# Altium PCB bme_radar.PcbDoc
Units mm, origin at the board's own origin, x right, y up, seen from the top; angles counter-clockwise.
Board outline 41 x 23 mm, 4 copper layers (Top Layer, GND, PWR, Bottom Layer), stack 0.603 mm thick; 42 components, 18 nets, 127 pads, 47 vias.
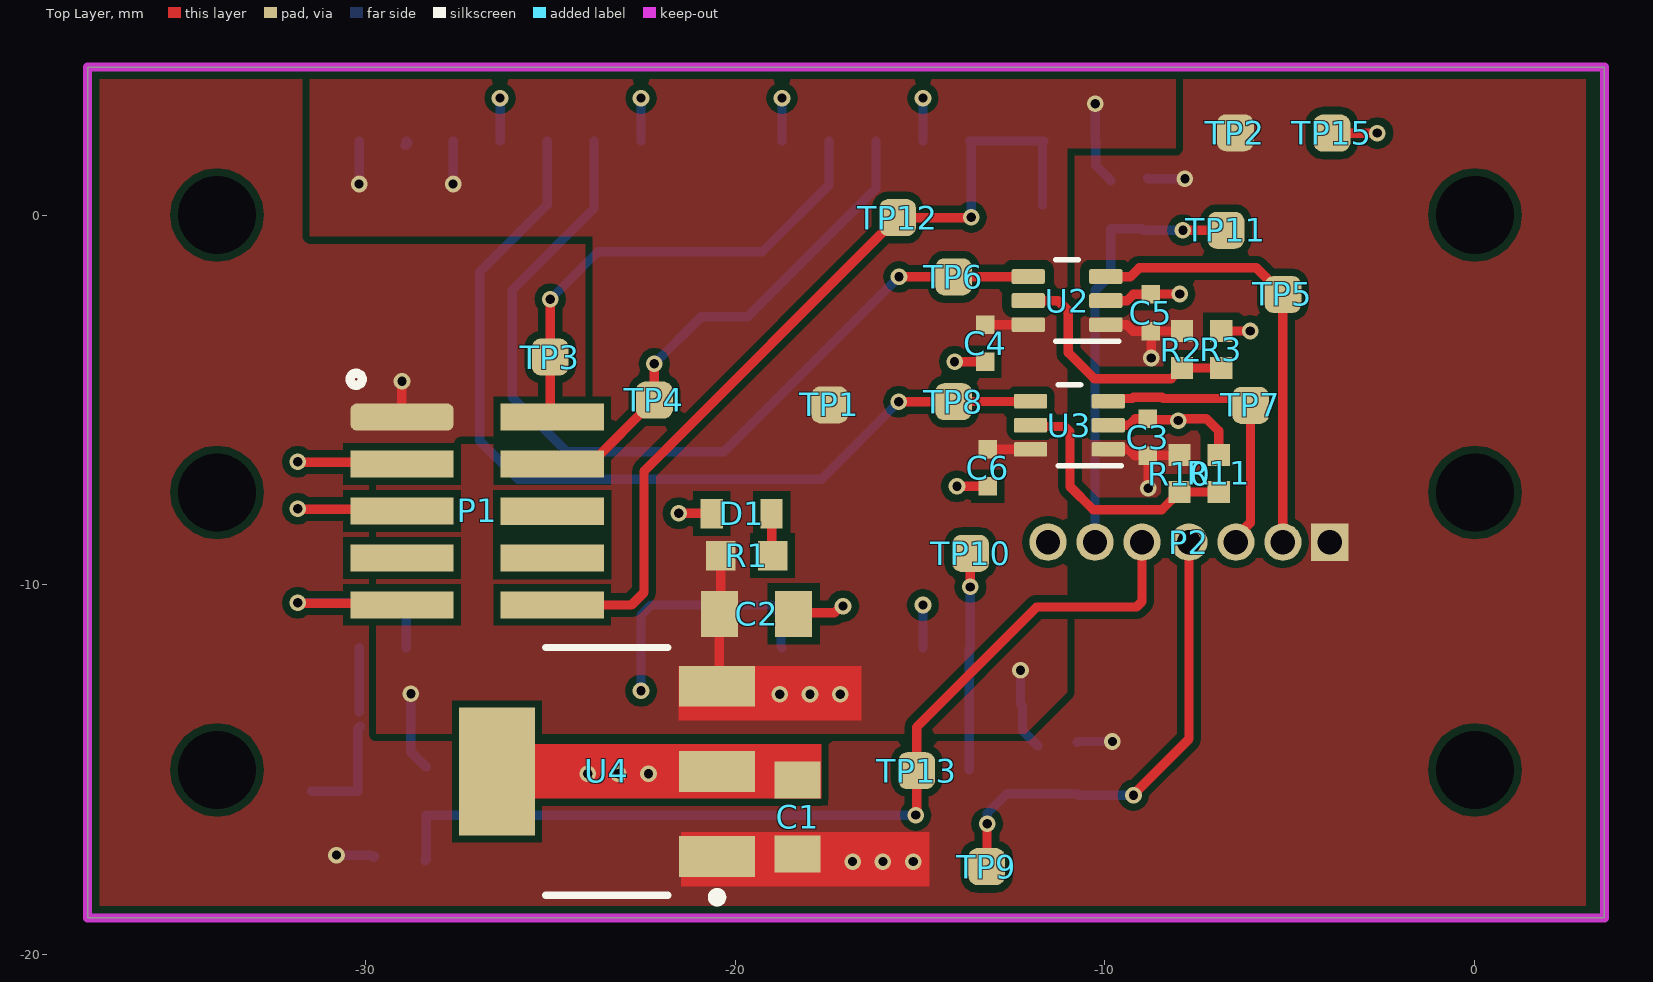
[diagram p0: Top Layer view]
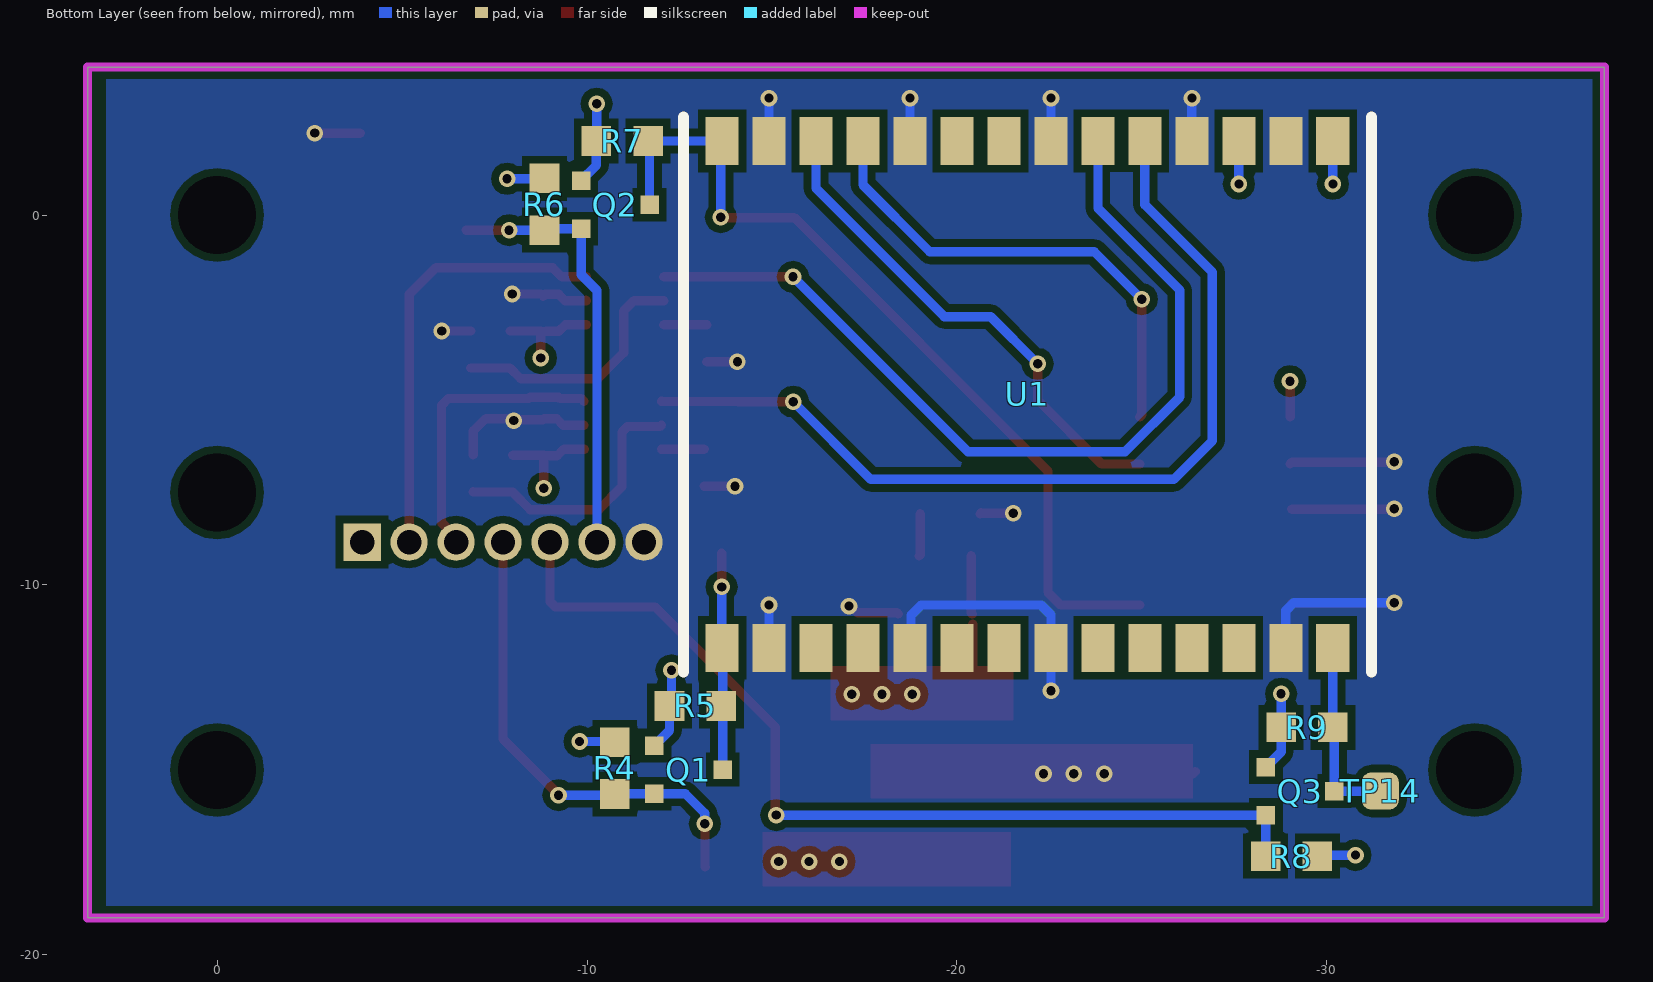
[diagram p1: Bottom Layer view, seen from below]
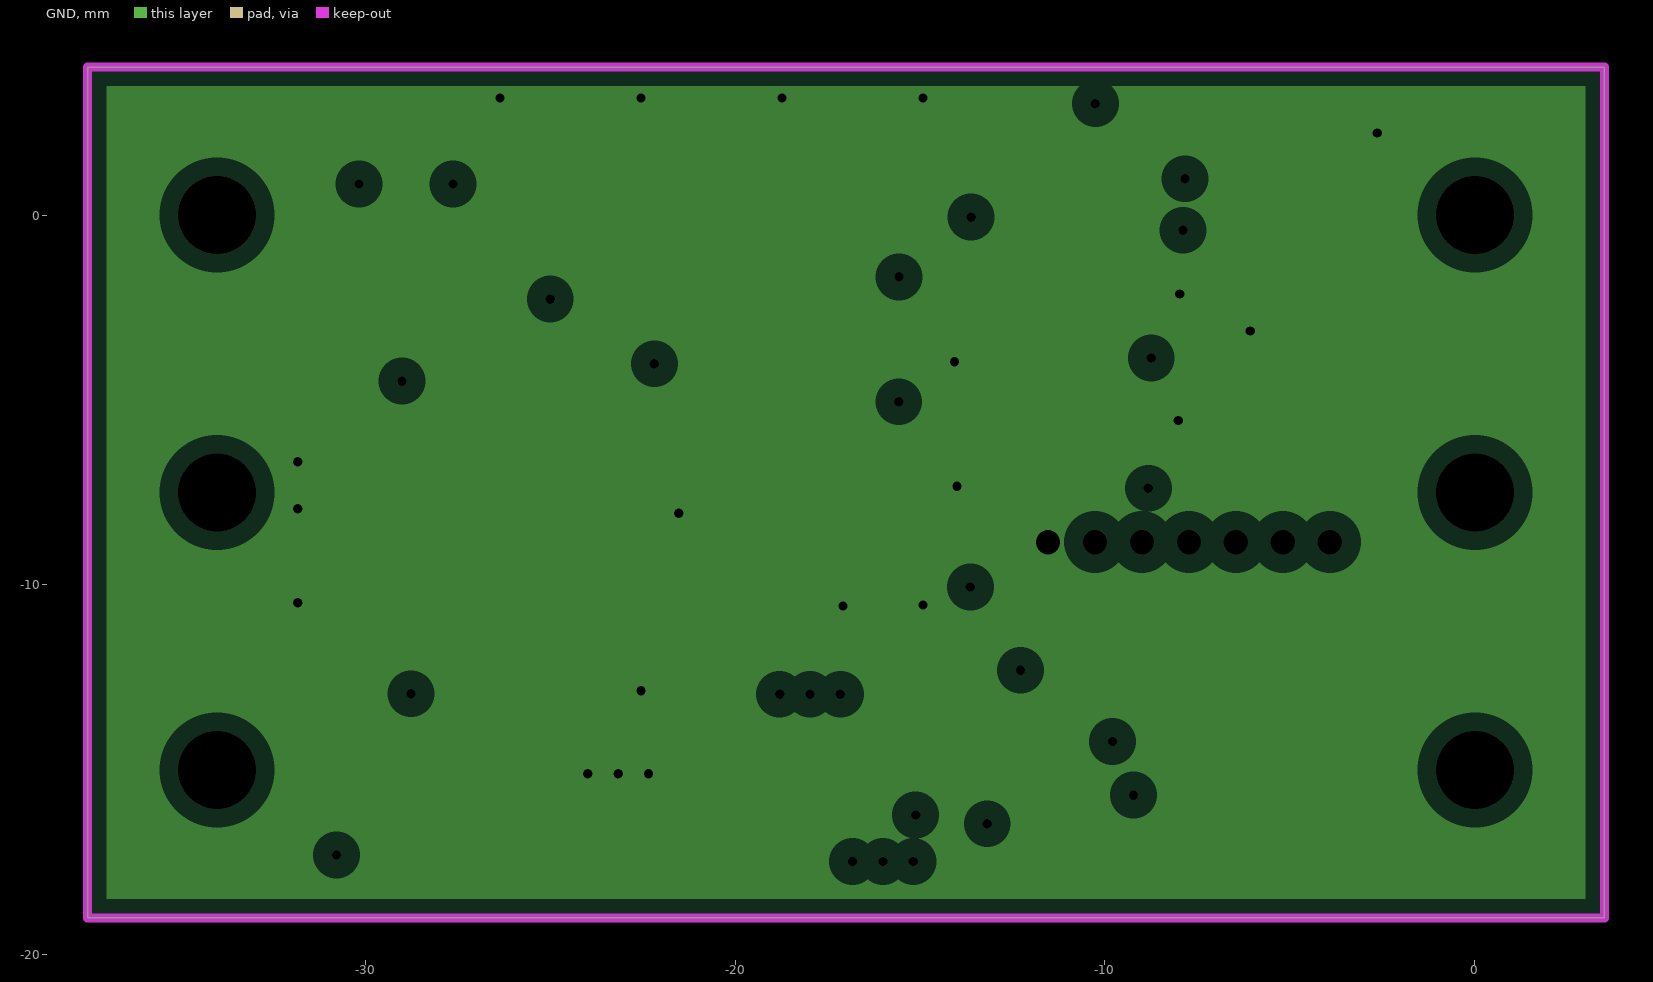
[diagram p2: GND, clearances drawn from the general rule]
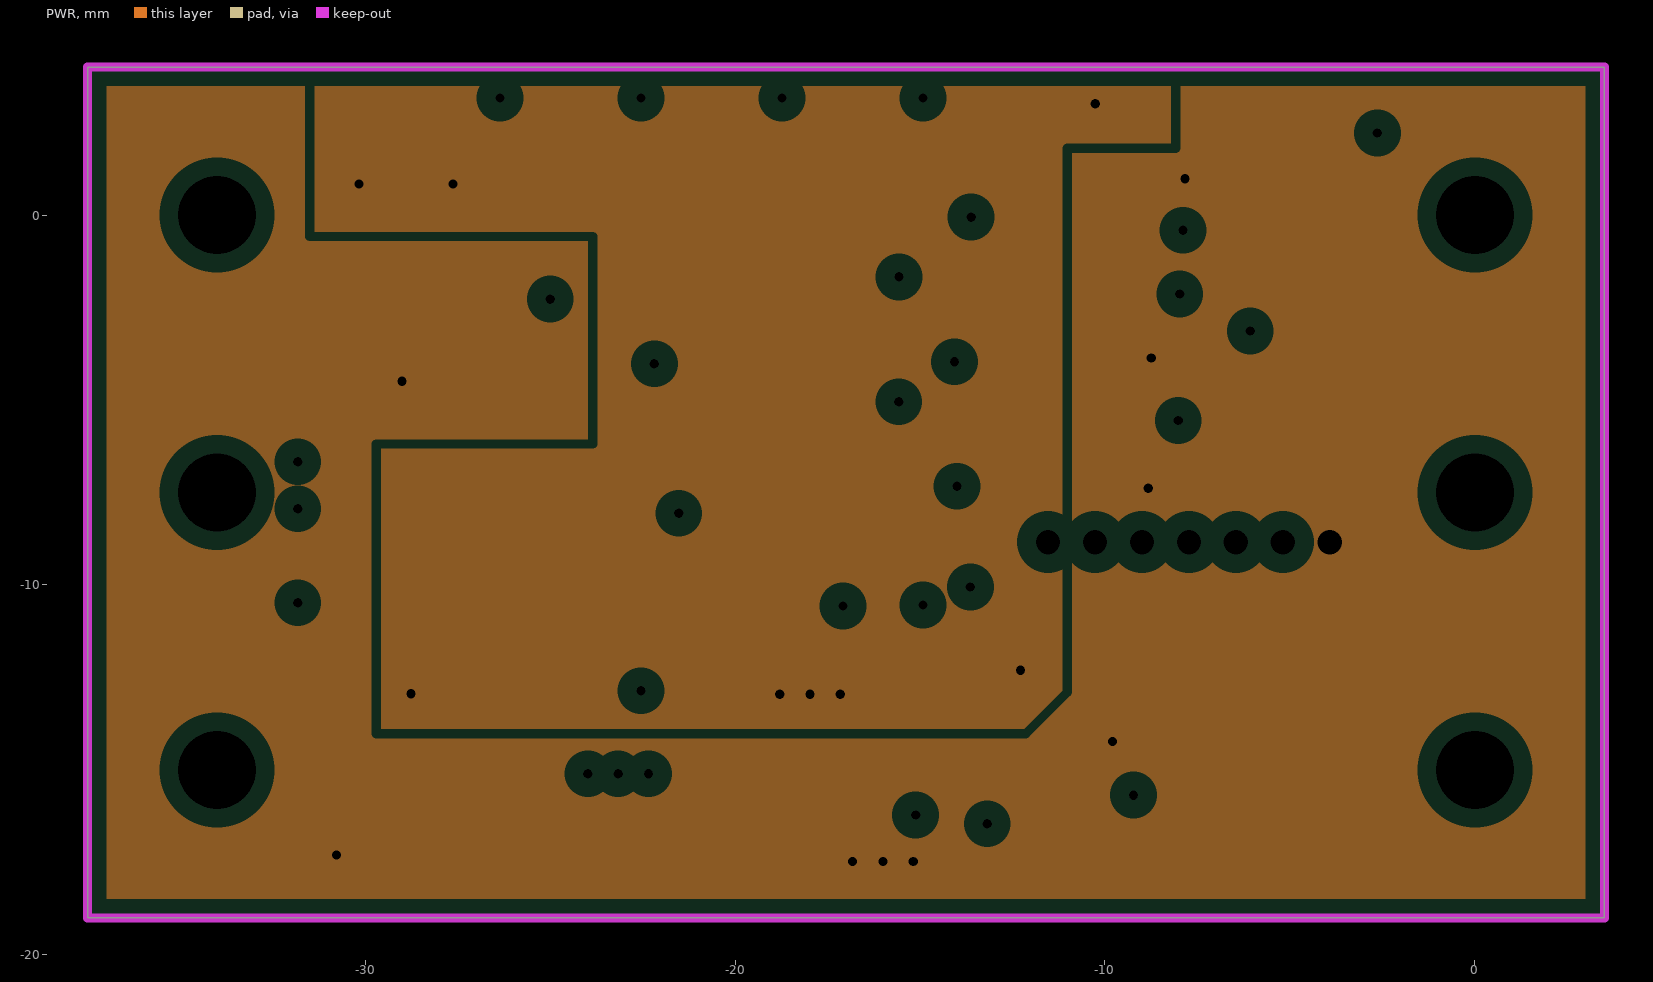
[diagram p3: PWR, clearances drawn from the general rule]
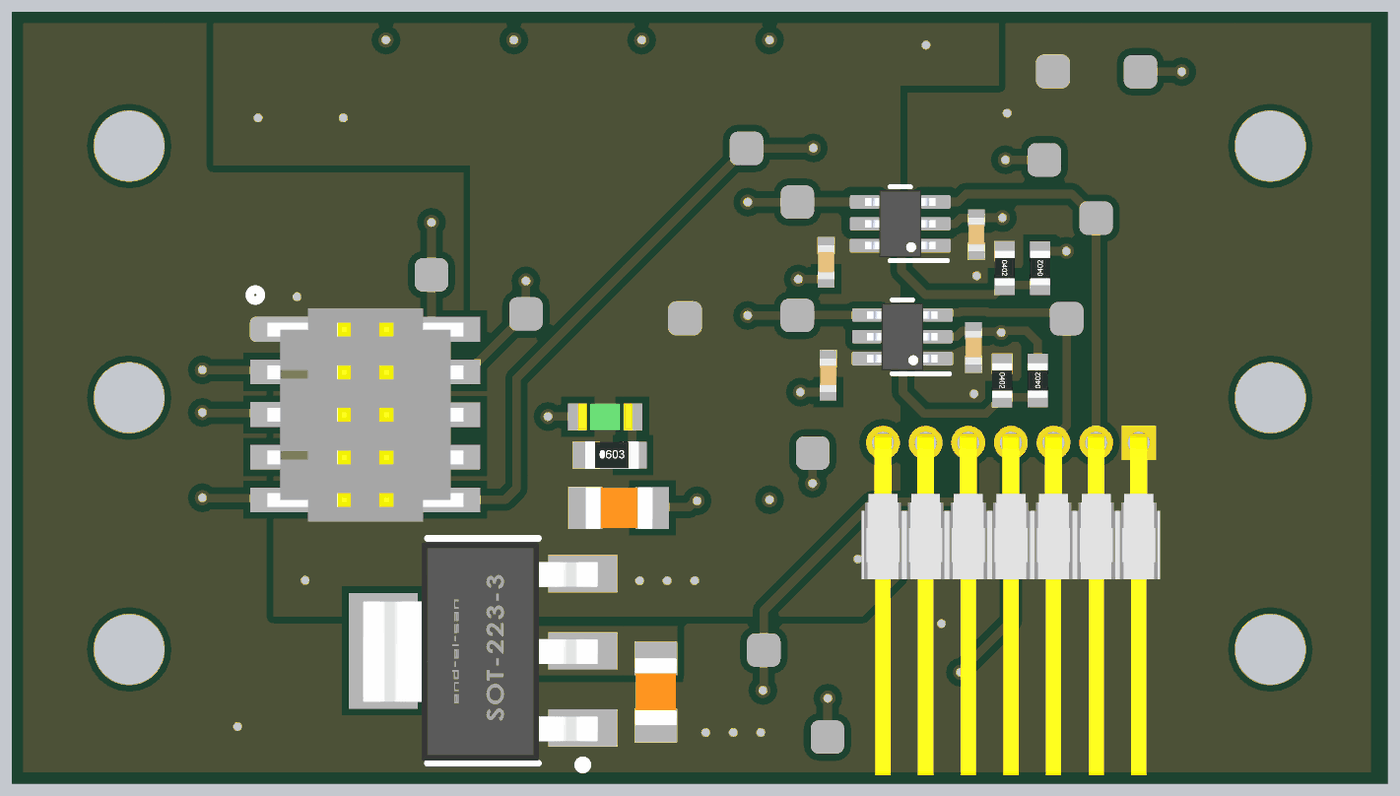
[diagram p4: 3D render of the assembled board from above, using the file's embedded part models]
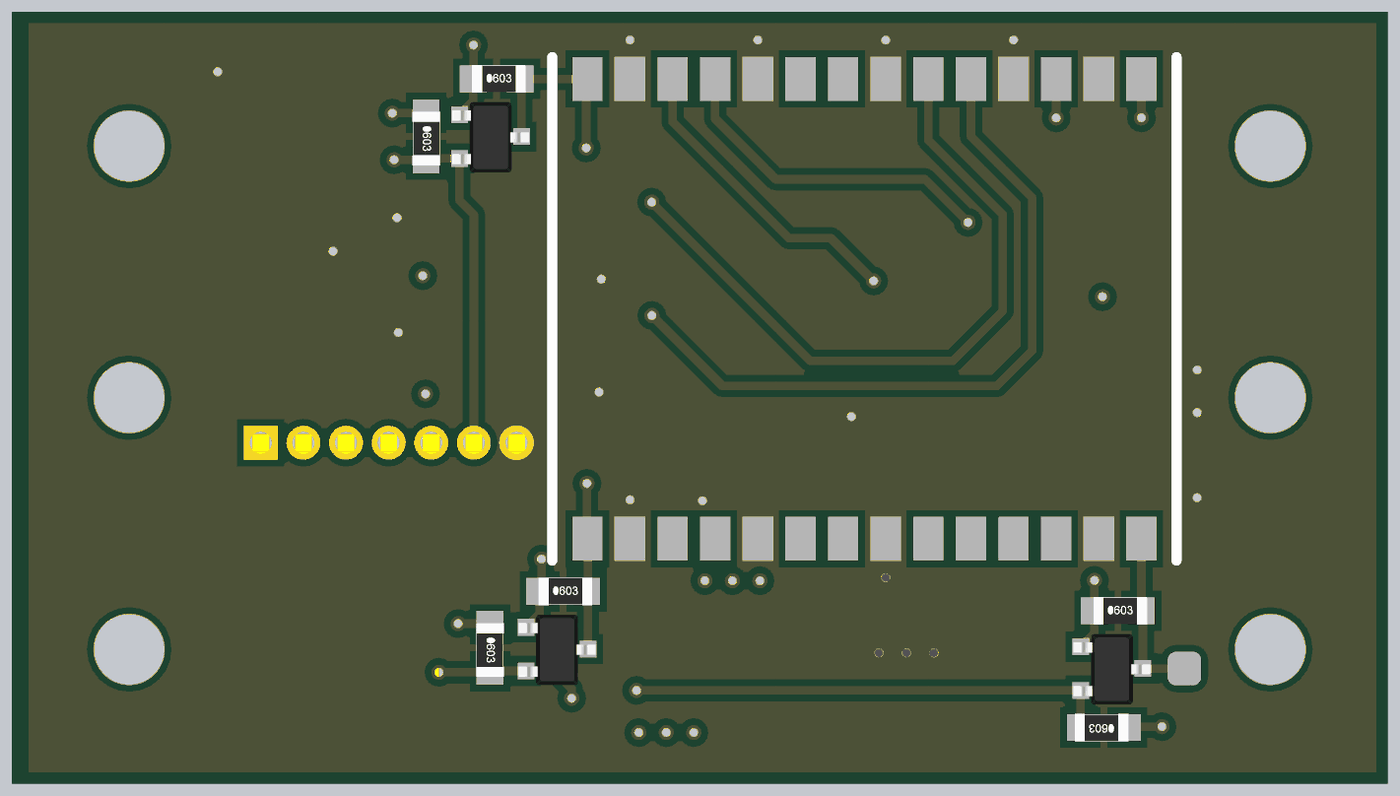
[diagram p5: 3D render of the assembled board from below, using the file's embedded part models]

## Layer stack, top to bottom
Top Solder: solder mask 0.0102, Solder Resist, Dk 3.5
Top Layer: signal copper 0.0356
Dielectric 2: prepreg 0.0711, PP-006, Dk 4.1
GND: plane copper 0.035, net GND
Dielectric 1: dielectric 0.32, FR-4, Dk 4.8
PWR: plane copper 0.035, net (Multiple Nets)
Dielectric 3: prepreg 0.0711, PP-006, Dk 4.1
Bottom Layer: signal copper 0.0356
Bottom Solder: solder mask 0.0102, Solder Resist, Dk 3.5

## Board outline
-37.5,-19 3.5,-19 3.5,4 -37.5,4

## Design rules (kind name [scope] priority, off if disabled: settings)
Clearance Clearance_1 [InComponent('U2')] p1: gap=0.254 ignorepadtopadclearanceinfootprint=FALSE except(0: Arc-Hole Track-Hole SMDPad-Hole THPad-Hole Via-Hole Fill-Hole Poly-Hole Region-Hole Text-Hole; 0.2: Arc-Arc Arc-Track Arc-SMDPad Track-Track Track-SMDPad SMDPad-SMDPad)
Clearance [All] p2: gap=0.2 ignorepadtopadclearanceinfootprint=FALSE except(0: Arc-Hole Track-Hole SMDPad-Hole THPad-Hole Via-Hole Fill-Hole Poly-Hole Region-Hole Text-Hole)
MinimumSolderMaskSliver [All] p1: minsoldermaskwidth=0.15
PlaneClearance [All] p1: clearance=0.508
PlaneConnect [All] p1: planeconnectstyle=Direct reliefexpansion=0.508 reliefentries=4 reliefconductorwidth=0.254 reliefairgap=0.254
PolygonConnect [All] p1: connectstyle=Direct reliefconductorwidth=0.254 reliefentries=4 polygonreliefangle="90 Angle" airgapwidth=0.254
RoutingVias [All] p1: holewidth=0.25 width=0.45 viastyle="Through Hole" minholewidth=0.25 minwidth=0.45 maxholewidth=0.25 maxwidth=0.45
SilkToSilkClearance [All] p1 off: silktosilkclearance=0.254
SilkToSolderMaskClearance [IsPad] p1: minsilkscreentomaskgap=0.15 clearancetoexposedcopper=TRUE
SolderMaskExpansion [All] p1: expansion=0.102 istentingtop=FALSE
Width [All] p1: maxlimit=0.254 minlimit=0.254 preferedwidth=0.254
25 further rules are at their usual default settings.

## Components (designator, comment, footprint, x,y, rotation, side; value= is the part's Value field where it differs from the comment)
C1 "0805, capacitor" "0805, CAP" -18.31,-15.27 r270 top value=4.7u
C2 "0805, capacitor" "0805, CAP" -18.413,-10.783 r180 top value=100n
C3 "0603, capacitor" "0402 CAP" -8.843,-6.004 r90 top value=100n
C4 "0603, capacitor" "0402 CAP" -13.234,-3.464 r270 top value=100n
C5 "0603, capacitor" "0402 CAP" -8.758,-2.636 r90 top value=100n
C6 "0603, capacitor" "0402 CAP" -13.17,-6.833 r270 top value=100n
D1 "0603, LED" "0603 LED" -19.01,-8.07 r180 top
P1 "ARM 10 pin SWD" "FTSH-105-01-L-DV-K even odd" -24.936,-5.46 r270 top value="2x5 Pin Header, 2.54mm, Th"
P2 "1x7 Pin Header R/A" 1x7_HEADER_R/A -7.73,-8.84 r180 top value="1x8 Pin Header"
Q1 "BSS138" SOT323 -11.82,-14.34 r180 bottom value="N-Channel MOSFET"
Q2 "BSS138" SOT323 -9.84,0.93 r180 bottom value="N-Channel MOSFET"
Q3 "BSS138" SOT323 -28.35,-14.92 r180 bottom value="N-Channel MOSFET"
R1 "0603, resistor" 0603 -19.684,-9.207 r0 top value=TBD
R2 "0603, resistor" "0402 res" -7.919,-3.636 r90 top value=0R
R3 "0603, resistor" "0402 res" -6.86,-3.634 r270 top value=NC
R4 "0603, resistor" 0603 -10.75,-14.95 r270 bottom value=10k
R5 "0603, resistor" 0603 -12.93,-13.27 r180 bottom value=10k
R6 "0603, resistor" 0603 -8.85,0.29 r270 bottom value=10k
R7 "0603, resistor" 0603 -10.95,2 r180 bottom value=10k
R8 "0603, resistor" 0603 -29.04,-17.33 r0 bottom value=10k
R9 "0603, resistor" 0603 -29.46,-13.85 r180 bottom value=10k
R10 "0603, resistor" "0402 res" -7.988,-6.988 r90 top value=NC
R11 "0603, resistor" "0402 res" -6.927,-6.984 r270 top value=0R
TP1 "Test Point" TESTPOINT_SMD -17.441,-5.133 r90 top value="Test point"
TP2 "Test Point" TESTPOINT_SMD -6.477,2.223 r180 top value="Test point"
TP3 "Test Point" TESTPOINT_SMD -24.994,-3.838 r90 top value="Test point"
TP4 "Test Point" TESTPOINT_SMD -22.18,-5.003 r90 top value="Test point"
TP5 "Test Point" TESTPOINT_SMD -5.19,-2.148 r90 top value="Test point"
TP6 "Test Point" TESTPOINT_SMD -14.092,-1.671 r90 top value="Test point"
TP7 "Test Point" TESTPOINT_SMD -6.066,-5.145 r90 top value="Test point"
TP8 "Test Point" TESTPOINT_SMD -14.093,-5.045 r90 top value="Test point"
TP9 "Test Point" TESTPOINT_SMD -13.196,-17.611 r90 top value="Test point"
TP10 "Test Point" TESTPOINT_SMD -13.634,-9.146 r90 top value="Test point"
TP11 "Test Point" TESTPOINT_SMD -6.733,-0.412 r90 top value="Test point"
TP12 "Test Point" TESTPOINT_SMD -15.607,-0.071 r90 top value="Test point"
TP13 "Test Point" TESTPOINT_SMD -15.092,-15.019 r90 top value="Test point"
TP14 "Test Point" TESTPOINT_SMD -31.441,-15.569 r90 bottom value="Test point"
TP15 "Test Point" TESTPOINT_SMD -3.868,2.214 r180 top value="Test point"
U1 "XM124" XM124 -31.205,2.65 r0 bottom locked value=Radar
U2 "SN74AXC1T45-Q1" SOT65P210X110-6N -11.026,-2.314 r180 top value="Level Translator"
U3 "SN74AXC1T45-Q1" SOT65P210X110-6N -10.962,-5.683 r180 top value="Level Translator"
U4 "3.3V Reg" SOT223 -23.46,-15.04 r180 top value=MCP1826S

## Footprints (in the part's own frame and the unit in brackets; to place one, negate y for a bottom-side part, rotate by r counter-clockwise, add the part's x,y. Pads: shape width x height; smd on the part's side, far side on the other; paste and mask are expansions set on the pad)
1x7_HEADER_R/A [mm] "1.27 mm pitch"
  rect 1.01x1.01 hole 0.66 paste+0 mask+0.01: 1(-3.81,0)
  round 1.01 hole 0.66 paste+0 mask+0.01: 2(-2.54,0) 3(-1.27,0) 4(0,0) 5(1.27,0) 6(2.54,0) 7(3.81,0)
  body extent -4.45,-0.25 4.44,9.91, height 2.45
"0402 CAP" [mm]
  rect 0.5x0.5 smd paste+0 mask+0.01: 0(0.5,0) 1(-0.5,0)
  body extent -0.5,-0.25 0.5,0.25, height 0.5
"0402 res" [mm]
  rect 0.6x0.6 smd paste+0 mask+0.01: 0(0.5,0) 1(-0.5,0)
  body extent -0.52,-0.3 0.52,0.3, height 0.34
0603 [mm]
  rect 0.8x0.8 smd paste+0 mask+0.01: 0(0.7,0) 1(-0.7,0)
  body extent -0.73,-0.41 0.87,0.41, height 0.45
"0603 LED" [mm]
  rect 0.6x0.8 smd paste+0 mask+0.01: 0(1.62,0) 1(0,0)
  body extent 0,-0.4 1.62,0.4, height 1.1
"0805, CAP" [mm]
  rect 1x1.25 smd paste+0 mask+0.01: 0(0,0) 1(2,0)
  body extent -0.01,-0.62 1.99,0.63, height 0.8
"FTSH-105-01-L-DV-K even odd" [mil] "1.27 Male Header"
  rrect50% 29x110 smd paste+0 mask+0.39: 1(0,-160)
  rect 29x110 smd paste+0 mask+0.39: 2(0,0) 3(50,-160) 4(50,0) 5(100,-160) 6(100.4,0) 7(150,-160) 8(150,0) 9(200,-160) 10(200,0)
  silkscreen extent -47,-215 -34,-202, body extent -25,-195 225,35, height 245
SOT65P210X110-6N [mm]
  rrect25% 0.9x0.4 smd paste+0 mask+0.01: 1(-1.05,0.65) 2(-1.05,0) 3(-1.05,-0.65) 4(1.05,-0.65) 5(1.05,0) 6(1.05,0.65)
  silkscreen extent -1.4,-1.1 0.3,1.1, body extent -1.05,-1 1.05,1, height 1.1
SOT223 [mm] "SOT223, 4-Leads, Body 6,50x7,10mm (avg), Pitch 2,30mm, IPC Medium Density"
  rect 2.05x1.1 smd paste+0 mask+0.01: 1(-2.975,2.3) 2(-2.975,0) 3(-2.975,-2.3)
  rect 2.05x3.45 smd paste+0 mask+0.01: 4(2.975,0)
  silkscreen extent -3.1,-3.35 1.65,3.52, body extent -3.42,-3.22 3.58,3.28, height 1.7
SOT323 [mm]
  rect 0.5x0.5 smd paste+0 mask+0.01: 1(0,0) 2(0,-1.3) 3(1.85,-0.65)
  body extent -0.22,-1.72 2.08,0.38, height 1
TESTPOINT_SMD [mm] "Diameter 2mm, Hole 0.3mm"
  rrect50% 1x1 smd paste+0 mask+0.01: 0(0,0)
XM124 [mm]
  rect 0.9x1.3 smd paste+0 mask+0.01: 1(1.045,0.65) 2(2.315,0.65) 3(3.585,0.65) 4(4.855,0.65) 5(6.125,0.65) 6(7.395,0.65) 7(8.665,0.65) 8(9.935,0.65) 9(11.205,0.65) 10(12.475,0.65) 11(13.745,0.65) 12(15.015,0.65) 13(16.285,0.65) 14(17.555,0.65) 15(17.555,14.35) 16(16.285,14.35) 17(15.015,14.35) 18(13.745,14.35) 19(12.475,14.35) 20(11.205,14.35) 21(9.935,14.35) 22(8.665,14.35) 23(7.395,14.35) 24(6.125,14.35) 25(4.855,14.35) 26(3.585,14.35) 27(2.315,14.35) 28(1.045,14.35)
  silkscreen extent 0,0 18.6,15, body extent 0,0 18.6,15, height 1.8

## Part data
C1: Manufacturer Part No=CL21A475KAQNNNE
C2: Manufacturer Part No=C0805C104M5RAC7800
C3 C4 C5 C6: Manufacturer Part No=GRM155R62A104KE14D
D1: Manufacturer Part No=150060SS75003
P1: "1.27mm, PH", Manufacturer Part No=FTSH-105-01-L-DV-K
P2: "1.27 mm", Manufacturer Part No=TMS-107-01-L-S-RA
Q1 Q2 Q3: "N-Channel Logic Level Enhancement Mode Field Effect Transistor", Manufacturer Part No=BSS138W-7-F
R2 R3 R10 R11: Manufacturer Part No=RMCF0402ZT0R00
R4 R5 R6 R7 R8 R9: Manufacturer Part No=CR0603-16W-1002FT
U1: "RF IC Sensor Radar 60GHz", Manufacturer Part No=XM124
U2 U3: "Automotive Qualified Single-Bit Dual-Supply Bus Transceiver with Configurable Voltage Translation, Tri-State Outputs", Manufacturer Part No=SN74AXC1T45QDCKRQ1
U4: library part MCP1826S, "1 A, Positive Fixed-Voltage, Low-ccDropout Regulator", Manufacturer Part No=MCP1826ST-1802E/DB, Drop Out=250mV
TP1 TP2 TP3 TP4 TP5 TP6 TP7 TP8 TP9 TP10 TP11 TP12 TP13 TP14 TP15: Farnell=1702006

## Free pads (board coordinates)
  oval 1x0.3 hole 2.1 paste+0 mask+0.01: 8(-34,-15) 8(-34,0) 9(-34,-7.5) 9(0,-15) 9(0,-7.5) 9(0,0)

## Via types
v1: diameter 0.45, hole 0.25, Top Layer to Bottom Layer, 47 vias

## Nets (pads, with @x,y where several pads share a name; then routed paths per layer and width w, separated by ;. In a path a pad name is that pad's centre, name@x,y a point inside that pad or via, vN(x,y) a via of type N, cw(c..) or ccw(c..) an arc to the next point about the centre after c; other vN are vias at no path point)
1V8: C2.1 C4.1 C6.1 Q1.1 Q2.1 Q3.1 R1.1 R5.1 R7.1 R9.1 TP1.0 U1.1 U1.3 U2.6 U3.6 U4.3 | length 16.4
  Top Layer w0.254: C2.1@-20.43,-11.06 -20.43,-12.685 U4.3 -19.06,-12.74 v1@-18.76,-13.04 ; C2.1 -20.384,-10.754 R1.1 ; C4.1 U2.6 ; C6.1 U3.6
  Bottom Layer w0.254: v1(-30.16,0.84) U1.1 ; v1(-28.76,-12.94) R9.1 -28.76,-14.51 Q3.1 ; v1(-27.62,0.84) U1.3 ; v1(-12.284,-12.306) -12.284,-13.216 R5.1 -12.23,-13.93 Q1.1 ; v1(-10.26,3.01) -10.26,2.01 R7.1 -10.25,1.34 Q2.1
  other v1: -18.793,-12.951 -17.973,-12.951 -17.153,-12.951
3V3: C1.1 C3.1 C5.1 P1.1 P2.1 R2.0 R4.1 R6.1 R8.1 R10.0 TP2.0 U2.1 U3.1 U4.1 | length 11.6
  Top Layer w0.254: P1.1@-29.005,-5.455 -29.005,-4.725 ; U4.1 -18.38,-17.34 C1.1 ; U2.1 -9.418,-2.964 -9.244,-3.138 C5.1@-8.894,-3.138 ; U3.1@-9.925,-6.33 -9.367,-6.33 -9.193,-6.504 C3.1 ; v1(-8.828,-7.385) -8.835,-7.378 -8.835,-6.511 C3.1 ; C5.1@-8.758,-3.151 -8.753,-3.157 -8.753,-3.859 v1(-8.748,-3.864) ; C5.1 R2.0 ; R10.0 -7.996,-6.496 -8.835,-6.496 C3.1
  Bottom Layer w0.254: v1(-30.77,-17.3) -29.83,-17.3 -29.77,-17.36 R8.1 ; R4.1 -10.73,-14.23 v1(-9.8,-14.23) ; R6.1 -8.84,0.98 v1(-7.84,0.98)
  other v1: -16.822,-17.476 -16.002,-17.476 -15.182,-17.476 -29,-4.49
GND: C1.0 C2.0 C3.0 C4.0 C5.0 C6.0 D1.0 P1.3 P1.5 P1.9 P2.7 R3.1 R11.1 TP15.0 U1.2 U1.4 U1.7 U1.10 U1.13 U1.16 U1.19 U1.22 U1.27 U2.2 U3.2 U4.2 U4.4 | length 45.7
  Top Layer w0.254: v1@-31.85,-10.49 P1.9@-29.05,-10.49 ; v1@-31.85,-7.95 P1.5@-29.05,-7.95 ; v1@-31.85,-6.68 -29.05,-6.68 P1.3 ; U4.4 -26.374,-15.101 v1(-23.978,-15.101) ; v1@-23.978,-15.081 -23.958,-15.101 -23.178,-15.101 -23.158,-15.081 -23.138,-15.101 -22.358,-15.101 v1@-22.338,-15.081 ; v1(-22.338,-15.101) -20.546,-15.101 U4.2 -18.54,-15.04 C1.0 ; v1(-21.52,-8.06) -20.66,-8.06 -20.65,-8.05 D1.0 ; C2.0 -18.384,-10.754 -17.316,-10.754 -17.133,-10.571 v1(-17.08,-10.571) ; v1(-14.065,-3.964) C4.0 ; v1(-14.001,-7.333) C6.0 ; U2.2 -9.971,-2.309 -9.963,-2.317 -9.405,-2.317 -9.231,-2.143 -8.881,-2.143 -8.879,-2.141 -8.879,-2.138 -8.819,-2.197 C5.0 v1(-7.981,-2.136) ; U3.2 -9.354,-5.683 -9.18,-5.509 C3.0@-8.843,-5.509 ; C3.0 -8.817,-5.53 -8.045,-5.53 v1(-8.019,-5.557) ; v1@-8.047,-5.504 -7.259,-5.504 -6.927,-5.836 R11.1 ; R3.1 v1(-6.074,-3.134) ; TP15.0 v1(-2.638,2.214)
  Bottom Layer w0.254: v1(-31.82,-10.48) -29.099,-10.48 -28.89,-10.689 U1.27 ; U1.2@-28.91,1.88 -28.84,1.95 U1.2 ; U1.4 v1(-26.35,3.16) ; v1(-22.54,-12.86) U1.22 -22.54,-10.81 -22.27,-10.54 -19.036,-10.54 -18.758,-10.818 -18.758,-11.672 U1.19 ; U1.7 v1(-22.54,3.16) ; U1.10 v1(-18.73,3.16) ; U1.16 v1(-14.92,-10.54) ; U1.13 v1(-14.92,3.16)
  other v1: -23.158,-15.101 -31.82,-7.94 -31.82,-6.67
NetD1_1: D1.1 R1.0 | length 1.1
  Top Layer w0.254: D1.1 -19.01,-9.181 R1.0
NetR2_1: R2.1 R3.0 U2.5 | length 6.9
  Top Layer w0.254: U2.5 -11.27,-2.314 -10.989,-2.595 -10.989,-3.724 -10.286,-4.427 -8.21,-4.427 R2.1 ; R2.1@-7.917,-4.134 R3.0
NetR10_1: R10.1 R11.0 U3.5 | length 7.1
  Top Layer w0.254: U3.5 -11.978,-5.717 -11.094,-5.717 -10.945,-5.866 -10.945,-7.34 -10.317,-7.968 -8.468,-7.968 -7.986,-7.486 -6.929,-7.486 R11.0
SWCLK: P1.4 TP4.0 U1.12 | length 13.7
  Top Layer w0.254: P1.4 -23.907,-6.73 TP4.0 v1(-22.18,-4.019)
  Bottom Layer w0.254: v1(-22.18,-4.019) -20.906,-2.745 -19.656,-2.745 -16.19,0.721 U1.12
SWDIO: P1.2 TP3.0 U1.11 | length 13.2
  Top Layer w0.254: v1(-24.994,-2.274) -24.994,-5.402 P1.2
  Bottom Layer w0.254: v1(-24.994,-2.274) -23.711,-0.991 -19.266,-0.991 -17.46,0.815 U1.11
XM124_MCU_INT: P2.5 Q3.2 R8.0 TP13.0 | length 26
  Top Layer w0.254: v1(-15.117,-16.22) -15.092,-16.195 -15.092,-13.842 -11.846,-10.596 -9.149,-10.596 -9,-10.447 P2.5
  Bottom Layer w0.254: R8.0@-28.38,-17.45 -28.35,-17.42 Q3.2 v1(-15.117,-16.22)
XM124_MCU_INT_1V8: Q3.3 R9.0 TP14.0 U1.28 | length 4.8
  Bottom Layer w0.254: TP14.0 Q3.3@-30.201,-15.569 ; Q3.3 -30.2,-13.89 R9.0 R9.0@-30.13,-13.82 ; -30.16,-13.43 U1.28
XM124_NRST: P2.6 Q2.2 R6.0 TP11.0 | length 11.8
  Top Layer w0.254: P2.6@-10.284,-9.05 P2.6@-10.27,-9.036 ; v1(-7.894,-0.41) -7.893,-0.411 TP11.0 TP11.0
  Bottom Layer w0.254: P2.6 -10.27,-2.039 -9.84,-1.609 Q2.2 -8.99,-0.37 -8.95,-0.41 R6.0 v1(-7.894,-0.41)
XM124_NRST_1V8: P1.10 Q2.3 R7.0 TP12.0 U1.14 | length 23.4
  Top Layer w0.254: P1.10 -22.8,-10.54 -22.46,-10.2 -22.46,-6.924 TP12.0 -13.63,-0.071 v1(-13.617,-0.058)
  Bottom Layer w0.254: v1(-13.617,-0.058) -13.617,1.967 U1.14 R7.0 -11.69,1.96 Q2.3
XM124_RX: P2.2 TP5.0 U2.3 | length 11.9
  Top Layer w0.254: U2.3 -9.973,-1.667 -9.313,-1.667 -9.076,-1.43 -5.908,-1.43 TP5.0 P2.2
XM124_RX_1V8: TP6.0 U1.6 U2.4 | length 24.4
  Top Layer w0.254: v1(-15.568,-1.671) TP6.0 -14.088,-1.667 -12.079,-1.667 U2.4
  Bottom Layer w0.254: U1.6 -23.81,0.181 -26.025,-2.034 -26.025,-4.916 -24.54,-6.401 -20.298,-6.401 v1(-15.568,-1.671)
XM124_TX: P2.3 TP7.0 U3.3 | length 7.8
  Top Layer w0.254: U3.3 -9.839,-4.96 -9.261,-4.96 -9.228,-4.927 -8.458,-4.927 -8.425,-4.96 -6.251,-4.96 TP7.0 -6.066,-8.313 -6.46,-8.707 P2.3
XM124_TX_1V8: TP8.0 U1.5 U3.4 | length 25.1
  Top Layer w0.254: v1(-15.572,-5.048) TP8.0@-14.096,-5.048 ; TP8.0 -14.087,-5.039 -12.018,-5.039 U3.4
  Bottom Layer w0.254: U1.5 -25.08,0.277 -26.903,-1.546 -26.903,-6.101 -25.858,-7.146 -17.67,-7.146 v1(-15.572,-5.048)
XM124_WAKE_UP: P2.4 Q1.2 R4.0 TP9.0 | length 13.1
  Top Layer w0.254: TP9.0 -13.19,-17.605 -13.19,-16.459 v1(-13.184,-16.453) ; v1(-9.23,-15.68) -9.23,-15.66 -7.73,-14.16 P2.4
  Bottom Layer w0.254: v1(-13.184,-16.453) -13.184,-16.169 -12.655,-15.64 Q1.2 -10.76,-15.64 R4.0 -10.72,-15.68 v1(-9.23,-15.68)
XM124_WAKE_UP_1V8: Q1.3 R5.0 TP10.0 U1.15 | length 5.9
  Top Layer w0.254: v1(-13.639,-10.052) -13.637,-10.049 -13.637,-9.148 TP10.0
  Bottom Layer w0.254: Q1.3 -13.67,-13.27 -13.67,-11.7 U1.15 -13.639,-11.689 v1(-13.639,-10.052)
pads on no net: P1.6 P1.7 P1.8 U1.8 U1.9 U1.17 U1.18 U1.20 U1.21 U1.23 U1.24 U1.25 U1.26

## Polygon pours and split planes (outlines as drawn)
3V3 on Top Layer "3V3_L01_P001" (solid, remove dead copper, pour order 1): 3,4 3,-19 -37.5,-19 -37.5,4 -31.49,4 -31.49,-0.58 -23.84,-0.58 -23.84,-6.19 -29.7,-6.19 -29.7,-14.02 -12.14,-14.02 -11.02,-12.9 -11.02,1.8 -8.09,1.8 -8.09,4
1V8 on Top Layer "1V8_L01_P000" (solid, remove dead copper, pour order 0): -8.09,4 -8.09,1.8 -11.02,1.8 -11.02,-12.9 -12.14,-14.02 -29.7,-14.02 -29.7,-6.19 -23.84,-6.19 -23.84,-0.58 -31.49,-0.58 -31.49,4
GND on Bottom Layer "GND_L04_P002" (solid, pour order 2): 3,4 -37.5,4 -37.5,-19 3,-19
3V3 on PWR (split plane): 2.99,-18.49 -36.99,-18.49 -36.99,3.49 -31.619,3.49 -31.619,-0.58 -31.61,-0.63 -31.582,-0.672 -31.54,-0.7 -31.49,-0.709 -23.969,-0.709 -23.969,-6.061 -29.7,-6.061 -29.75,-6.07 -29.792,-6.098 -29.82,-6.14 -29.829,-6.19 -29.829,-14.02 -29.82,-14.07 -29.792,-14.112 -29.75,-14.14 -29.7,-14.149 -12.14,-14.149 -12.091,-14.14 -12.048,-14.112 -10.928,-12.992 -10.9,-12.949 -10.891,-12.9 -10.891,1.671 -8.09,1.671 -8.04,1.68 -7.998,1.708 -7.97,1.75 -7.961,1.8 -7.961,3.49 2.99,3.49
1V8 on PWR (split plane): -8.219,1.929 -11.02,1.929 -11.07,1.92 -11.112,1.892 -11.14,1.85 -11.149,1.8 -11.149,-12.846 -12.194,-13.891 -29.571,-13.891 -29.571,-6.319 -23.84,-6.319 -23.79,-6.31 -23.748,-6.282 -23.72,-6.24 -23.711,-6.19 -23.711,-0.58 -23.72,-0.53 -23.748,-0.488 -23.79,-0.46 -23.84,-0.451 -31.361,-0.451 -31.361,3.49 -8.219,3.49
GND on GND (split plane): 2.99,-18.49 -36.99,-18.49 -36.99,3.49 2.99,3.49

## Keep-outs
Keep-Out Layer:
  the board outline again, w0.254

## Other copper
Top Layer:
  region net 3V3: -21.45,-16.685 -14.755,-16.685 -14.755,-18.145 -21.45,-18.145
  region net GND: -26.367,-14.31 -17.67,-14.31 -17.67,-15.77 -26.367,-15.77
  region net 1V8: -21.52,-12.2 -16.588,-12.2 -16.588,-13.66 -21.52,-13.66
PWR (plane layer: these items are gaps in the copper):
  lines w0.254: -31.49,4 -31.49,-0.58 -23.84,-0.58 -23.84,-6.19 -29.7,-6.19 -29.7,-14.02 -12.14,-14.02 -11.02,-12.9 -11.02,1.8 -8.09,1.8 -8.09,4.04